# EAGLE board Noduino-Open-Onoff-V1.0-Produce (EAGLE 6.6.0), part 1 of 2
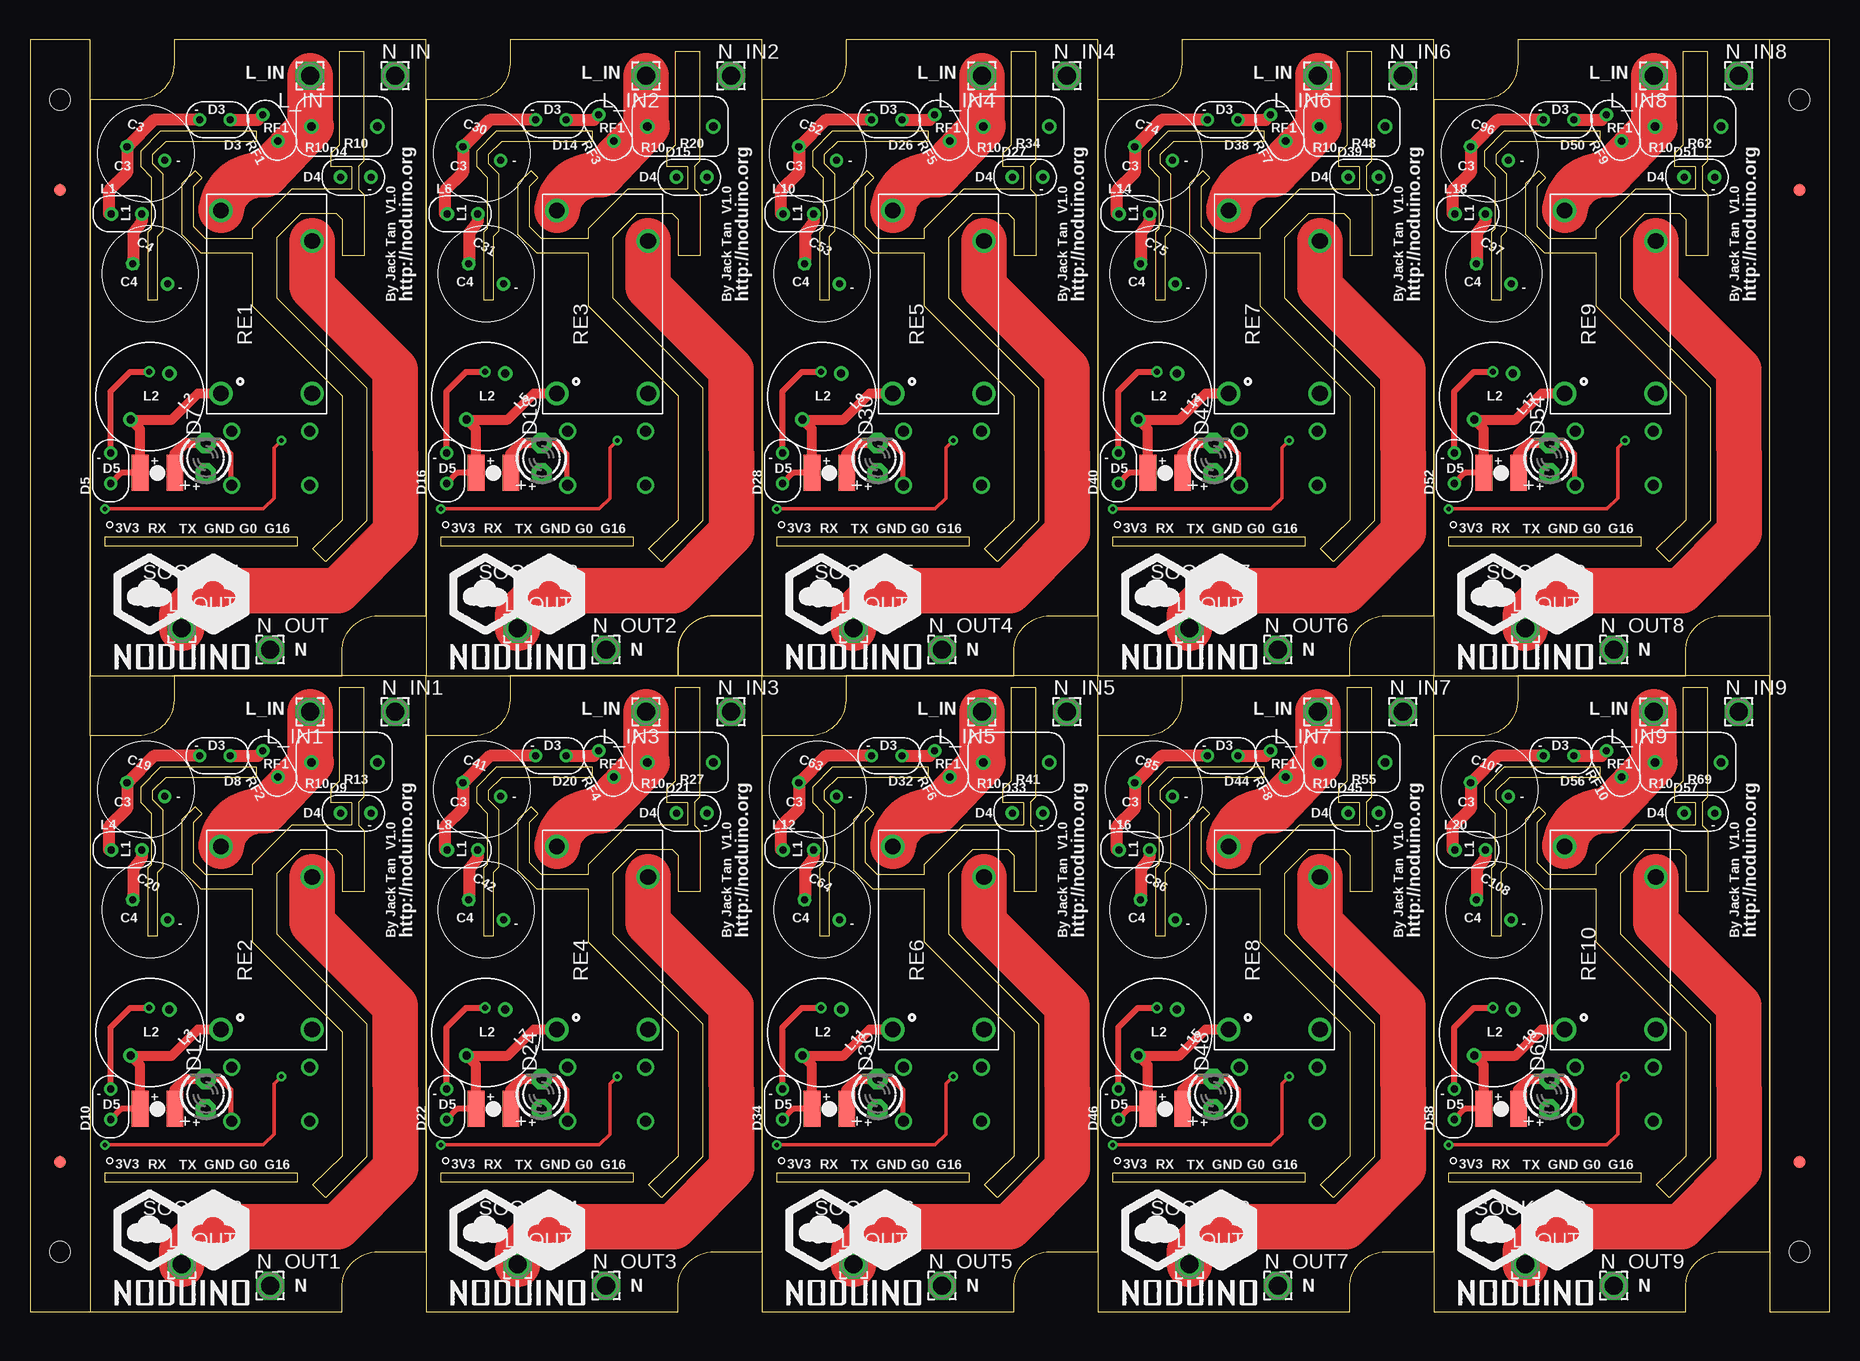
[diagram p0: board, top side]
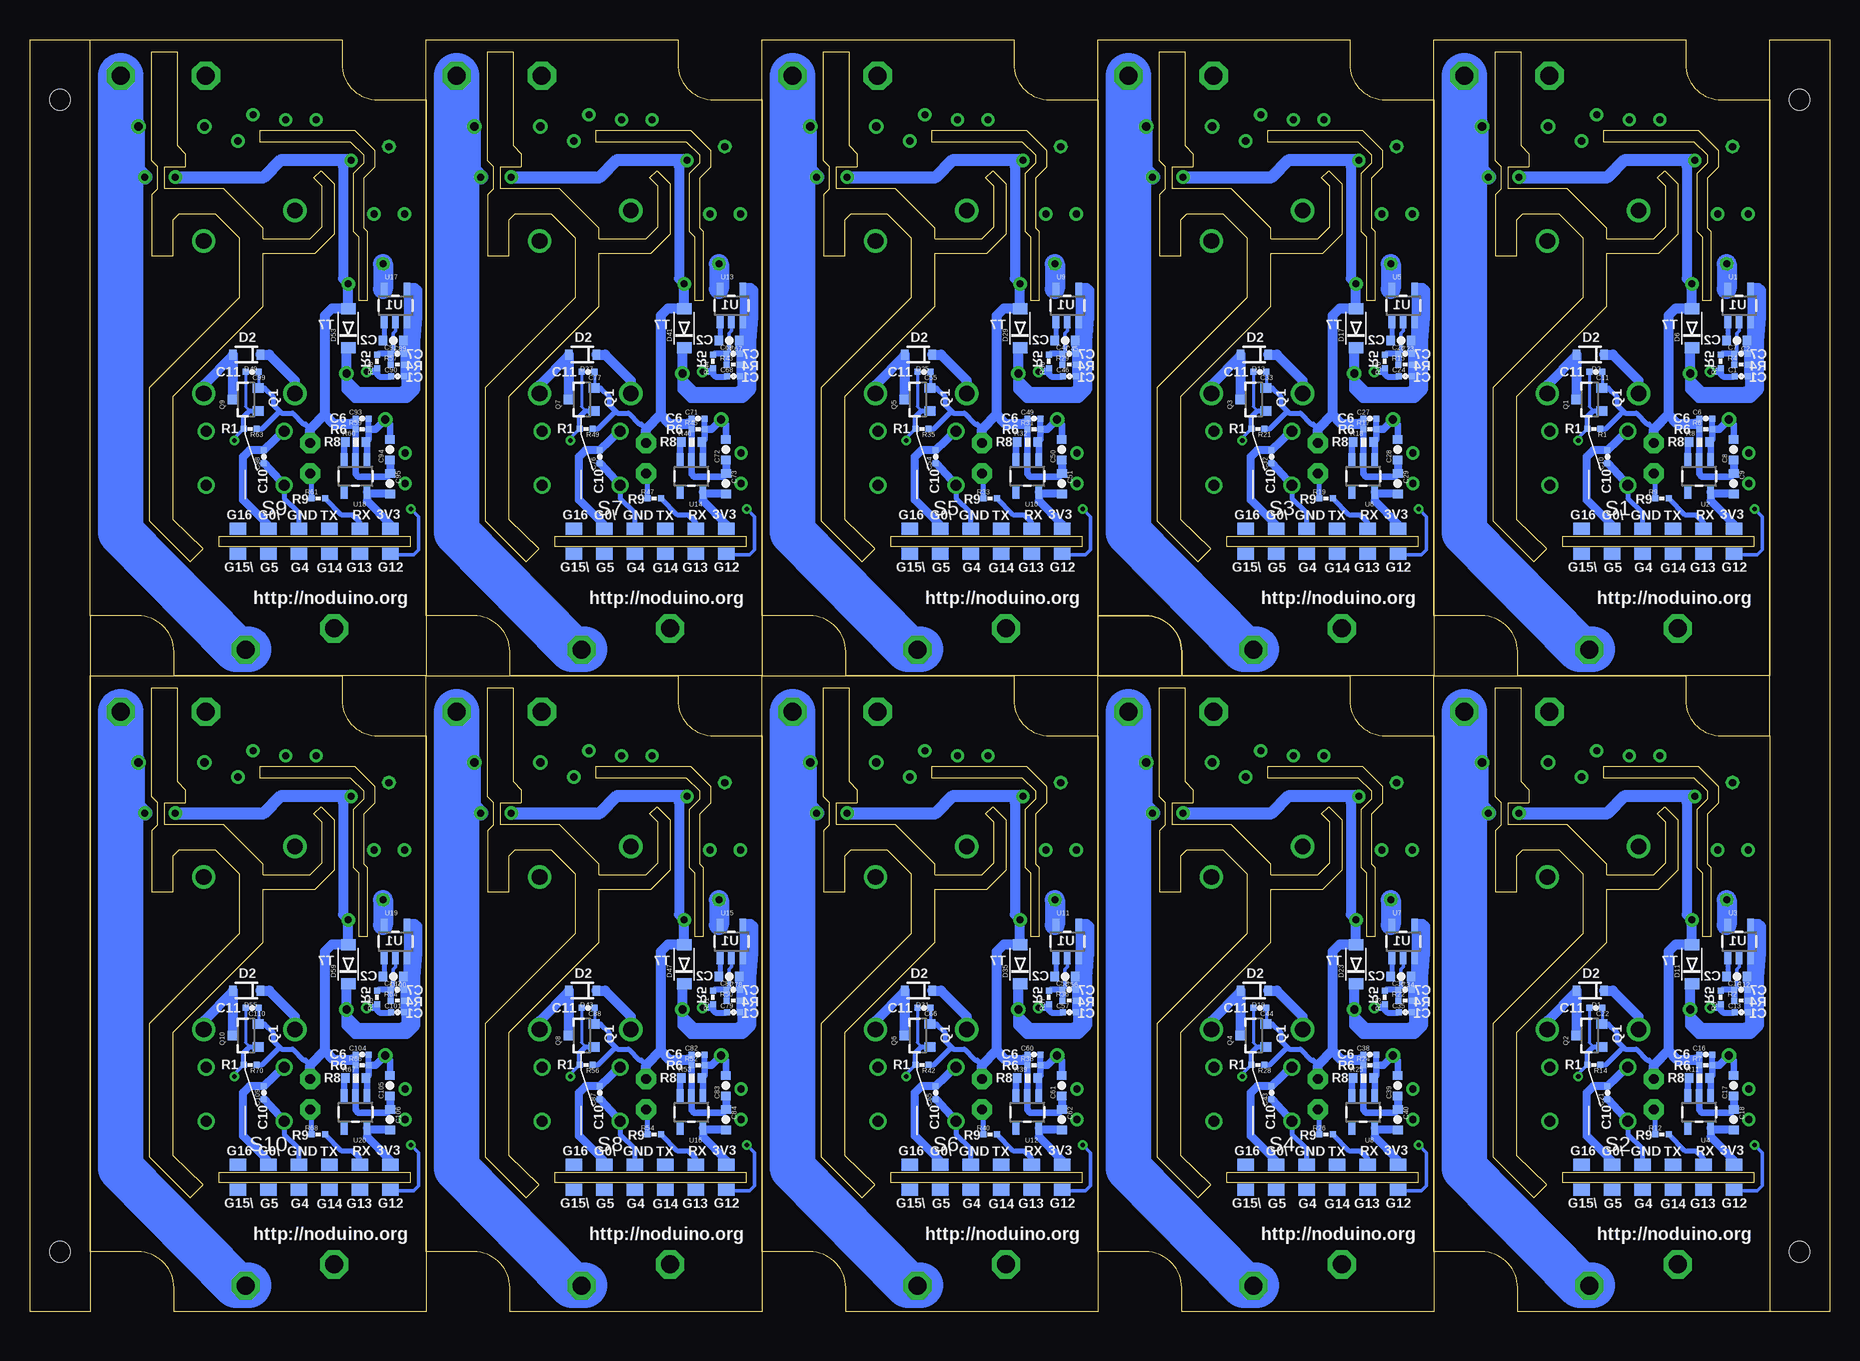
[diagram p1: board, bottom side, seen from below]

Size 150 x 106 mm. Coordinates in mm from the lower left corner, seen from the top.
Outline: 5,101 5,53
Outline: 5,48 5,0
Outline: 145,58 145,106
Outline: 145,5 145,53
Outline: 145,106 150,106 150,0 145,0 145,58
Outline: 5,0 0,0 0,106 5,106 5,48
Outline: 5,101 9,101 arc90 12,104 12,106 33,106 33,58 29,58 arc90 26,55 26,53 5,53
Outline: 5,101 5,53
Outline: 33,53 33,5 29,5 arc90 26,2 26,0 5,0
Outline: 33,53 12,53 12,51 arc-90 9,48 5,48
Outline: 5,48 5,0
Outline: 33,53 33,101 37,101 arc90 40,104 40,106 61,106 61,58 57,58 arc90 54,55 54,53 33,53
Outline: 61,53 61,5 57,5 arc90 54,2 54,0 33,0 33,48 37,48 arc90 40,51 40,53 61,53
Outline: 61,53 61,101 65,101 arc90 68,104 68,106 89,106 89,58 85,58 arc90 82,55 82,53 61,53
Outline: 89,53 89,5 85,5 arc90 82,2 82,0 61,0 61,48 65,48 arc90 68,51 68,53 89,53
Outline: 89,53 89,101 93,101 arc90 96,104 96,106 117,106 117,58 113,58 arc90 110,55 110,53 89,53
Outline: 117,53 117,5 113,5 arc90 110,2 110,0 89,0 89,48 93,48 arc90 96,51 96,53 117,53
Outline: 145,58 145,106
Outline: 145,106 124,106 124,104 arc-90 121,101 117,101 117,53
Outline: 117,53 138,53 138,55 arc-90 141,58 145,58
Outline: 145,5 145,53
Outline: 145,53 124,53 124,51 arc-90 121,48 117,48 117,0 138,0 138,2 arc-90 141,5 145,5
Copper layers (1*16): Top 0.035mm / dielectric 1.5mm / Bottom 0.035mm
Design rules "default": minimum track width 10mil, minimum drill 24mil, track to track 8mil, track to pad 8mil, pad to pad 8mil, via to via 8mil, smd to smd 8mil, copper to edge 40mil, drill to drill 8mil, minimum pad ring 10mil, minimum via ring 8mil, stop-mask expansion 4mil, vias tented up to drill 0mil, thermal gap 10mil
Holes 1.7 mm at 147.5,101 147.5,5 2.5,5 2.5,101
Milling: 580 lines

## Footprints (pad centres in the part's own frame; a part is rotated, then mirrored left to right if it is on the bottom)
0402-CAP = smd 0.5 x 0.5: 1 -0.55,0; 2 0.55,0
0603-CAP = smd 0.7 x 0.8: 1 -0.85,0; 2 0.85,0
CPOL-RADIOA-3.3UF-400V = drill 0.6 octagon: P$1 -1.675,0 | drill 0.6: P$2 1.675,0
B3528-CAP = smd 1.4 x 3: 1 -1.45,0; 2 1.45,0
SOD-323 = smd 0.63 x 0.83: 1 -1.15,0; 2 1.15,0
2.54-0.5 = drill 0.6: P$1 -1.27,0; P$2 1.27,0
SOD-123 = smd 0.91 x 1.22: A 1.637,0; C -1.637,0
LED3MM = drill 0.813 pad 1.676 octagon: A -1.27,0; K 1.27,0
MARK-1MM = smd 1 x 1: P$1 0,0
INDUCTOR-5-0.5 = drill 0.7: P$1 -2.5,0; P$2 2.5,0
2,15/1,0 = drill 1.5 pad 2.35 octagon: 1 0,0
SOT23-3 = smd 0.8 x 0.9: 1 -0.95,-1; 2 0.95,-1; 3 0,1.1
0402-RES = smd 0.5 x 0.5: 1 -0.55,0; 2 0.55,0
0603-RES = smd 0.7 x 0.8: 1 -0.85,0; 2 0.85,0
07D471K = drill 0.7: P$1 -2.75,0; P$2 2.75,0
HKE-HRS3FN = drill 1.3: 1 0,7.6; 2 0,0; 3 12.7,0; 4 15.24,7.6
SWITCH-TS-037 = drill 0.9: P$1 -3.25,2.25; P$2 3.25,2.25; P$3 -3.25,-2.25; P$4 3.25,-2.25
MOD-PLUG-SOCKET-V2.0 = smd 1.4 x 1 bottom: 1 14.2,-1.04; 2 11.66,-1.04; 3 9.12,-1.04; 4 6.58,-1.04; 5 4.04,-1.04; 6 1.5,-1.06; 7 1.5,1.04; 8 4.04,1.04; 9 6.58,1.04; 10 9.12,1.04; 11 11.66,1.04; 12 14.2,1.04
SOT23-5 = smd 0.55 x 1.2: 1 -0.95,-1.3; 2 0,-1.3; 3 0.95,-1.3; 4 0.95,1.3; 5 -0.95,1.3

## Placement (x,y rotation side)
C1  220nF  [0402-CAP]  7.35,77.96 0 bottom
C2  2.2uF  [0603-CAP]  7.73,80.93 180 bottom
C3  400V/3.3uF  [CPOL-RADIOA-3.3UF-400V]  9.66,96.53 340 top
C4  400V/3.3uF  [CPOL-RADIOA-3.3UF-400V]  10.02,86.5 330 top
C5  100uF/6.3V  [B3528-CAP]  10.63,69.91 180 top
C6  1uF  [0402-CAP]  10.31,74.43 0 bottom
C7  470pF  [0402-CAP]  7.37,79.83 0 bottom
C8  4.7uF  [0603-CAP]  7.99,71.85 90 bottom
C9  4.7uF  [0603-CAP]  7.98,69.01 270 bottom
C10  100nF  [0402-CAP]  18.51,71.26 90 bottom
C11  100nF  [0402-CAP]  19.48,78.32 180 bottom
C12  2.2uF  [0603-CAP]  7.73,27.93 180 bottom
C13  220nF  [0402-CAP]  7.35,24.96 0 bottom
C14  470pF  [0402-CAP]  7.37,26.83 0 bottom
C15  100uF/6.3V  [B3528-CAP]  10.63,16.91 180 top
C16  1uF  [0402-CAP]  10.31,21.43 0 bottom
C17  4.7uF  [0603-CAP]  7.99,18.85 90 bottom
C18  4.7uF  [0603-CAP]  7.98,16.01 270 bottom
C19  400V/3.3uF  [CPOL-RADIOA-3.3UF-400V]  9.66,43.53 340 top
C20  400V/3.3uF  [CPOL-RADIOA-3.3UF-400V]  10.02,33.5 330 top
C21  100nF  [0402-CAP]  18.51,18.26 90 bottom
C22  100nF  [0402-CAP]  19.48,25.32 180 bottom
C23  2.2uF  [0603-CAP]  35.73,80.93 180 bottom
C24  220nF  [0402-CAP]  35.35,77.96 0 bottom
C25  470pF  [0402-CAP]  35.37,79.83 0 bottom
C26  100uF/6.3V  [B3528-CAP]  38.63,69.91 180 top
C27  1uF  [0402-CAP]  38.31,74.43 0 bottom
C28  4.7uF  [0603-CAP]  35.99,71.85 90 bottom
C29  4.7uF  [0603-CAP]  35.98,69.01 270 bottom
C30  400V/3.3uF  [CPOL-RADIOA-3.3UF-400V]  37.66,96.53 340 top
C31  400V/3.3uF  [CPOL-RADIOA-3.3UF-400V]  38.02,86.5 330 top
C32  100nF  [0402-CAP]  46.51,71.26 90 bottom
C33  100nF  [0402-CAP]  47.48,78.32 180 bottom
C34  2.2uF  [0603-CAP]  35.73,27.93 180 bottom
C35  220nF  [0402-CAP]  35.35,24.96 0 bottom
C36  470pF  [0402-CAP]  35.37,26.83 0 bottom
C37  100uF/6.3V  [B3528-CAP]  38.63,16.91 180 top
C38  1uF  [0402-CAP]  38.31,21.43 0 bottom
C39  4.7uF  [0603-CAP]  35.99,18.85 90 bottom
C40  4.7uF  [0603-CAP]  35.98,16.01 270 bottom
C41  400V/3.3uF  [CPOL-RADIOA-3.3UF-400V]  37.66,43.53 340 top
C42  400V/3.3uF  [CPOL-RADIOA-3.3UF-400V]  38.02,33.5 330 top
C43  100nF  [0402-CAP]  46.51,18.26 90 bottom
C44  100nF  [0402-CAP]  47.48,25.32 180 bottom
C45  2.2uF  [0603-CAP]  63.73,80.93 180 bottom
C46  220nF  [0402-CAP]  63.35,77.96 0 bottom
C47  470pF  [0402-CAP]  63.37,79.83 0 bottom
C48  100uF/6.3V  [B3528-CAP]  66.63,69.91 180 top
C49  1uF  [0402-CAP]  66.31,74.43 0 bottom
C50  4.7uF  [0603-CAP]  63.99,71.85 90 bottom
C51  4.7uF  [0603-CAP]  63.98,69.01 270 bottom
C52  400V/3.3uF  [CPOL-RADIOA-3.3UF-400V]  65.66,96.53 340 top
C53  400V/3.3uF  [CPOL-RADIOA-3.3UF-400V]  66.02,86.5 330 top
C54  100nF  [0402-CAP]  74.51,71.26 90 bottom
C55  100nF  [0402-CAP]  75.48,78.32 180 bottom
C56  2.2uF  [0603-CAP]  63.73,27.93 180 bottom
C57  220nF  [0402-CAP]  63.35,24.96 0 bottom
C58  470pF  [0402-CAP]  63.37,26.83 0 bottom
C59  100uF/6.3V  [B3528-CAP]  66.63,16.91 180 top
C60  1uF  [0402-CAP]  66.31,21.43 0 bottom
C61  4.7uF  [0603-CAP]  63.99,18.85 90 bottom
C62  4.7uF  [0603-CAP]  63.98,16.01 270 bottom
C63  400V/3.3uF  [CPOL-RADIOA-3.3UF-400V]  65.66,43.53 340 top
C64  400V/3.3uF  [CPOL-RADIOA-3.3UF-400V]  66.02,33.5 330 top
C65  100nF  [0402-CAP]  74.51,18.26 90 bottom
C66  100nF  [0402-CAP]  75.48,25.32 180 bottom
C67  2.2uF  [0603-CAP]  91.73,80.93 180 bottom
C68  220nF  [0402-CAP]  91.35,77.96 0 bottom
C69  470pF  [0402-CAP]  91.37,79.83 0 bottom
C70  100uF/6.3V  [B3528-CAP]  94.63,69.91 180 top
C71  1uF  [0402-CAP]  94.31,74.43 0 bottom
C72  4.7uF  [0603-CAP]  91.99,71.85 90 bottom
C73  4.7uF  [0603-CAP]  91.98,69.01 270 bottom
C74  400V/3.3uF  [CPOL-RADIOA-3.3UF-400V]  93.66,96.53 340 top
C75  400V/3.3uF  [CPOL-RADIOA-3.3UF-400V]  94.02,86.5 330 top
C76  100nF  [0402-CAP]  102.51,71.26 90 bottom
C77  100nF  [0402-CAP]  103.48,78.32 180 bottom
C78  2.2uF  [0603-CAP]  91.73,27.93 180 bottom
C79  220nF  [0402-CAP]  91.35,24.96 0 bottom
C80  470pF  [0402-CAP]  91.37,26.83 0 bottom
C81  100uF/6.3V  [B3528-CAP]  94.63,16.91 180 top
C82  1uF  [0402-CAP]  94.31,21.43 0 bottom
C83  4.7uF  [0603-CAP]  91.99,18.85 90 bottom
C84  4.7uF  [0603-CAP]  91.98,16.01 270 bottom
C85  400V/3.3uF  [CPOL-RADIOA-3.3UF-400V]  93.66,43.53 340 top
C86  400V/3.3uF  [CPOL-RADIOA-3.3UF-400V]  94.02,33.5 330 top
C87  100nF  [0402-CAP]  102.51,18.26 90 bottom
C88  100nF  [0402-CAP]  103.48,25.32 180 bottom
C89  2.2uF  [0603-CAP]  119.73,80.93 180 bottom
C90  220nF  [0402-CAP]  119.35,77.96 0 bottom
C91  470pF  [0402-CAP]  119.37,79.83 0 bottom
C92  100uF/6.3V  [B3528-CAP]  122.63,69.91 180 top
C93  1uF  [0402-CAP]  122.31,74.43 0 bottom
C94  4.7uF  [0603-CAP]  119.99,71.85 90 bottom
C95  4.7uF  [0603-CAP]  119.98,69.01 270 bottom
C96  400V/3.3uF  [CPOL-RADIOA-3.3UF-400V]  121.66,96.53 340 top
C97  400V/3.3uF  [CPOL-RADIOA-3.3UF-400V]  122.02,86.5 330 top
C98  100nF  [0402-CAP]  130.51,71.26 90 bottom
C99  100nF  [0402-CAP]  131.48,78.32 180 bottom
C100  2.2uF  [0603-CAP]  119.73,27.93 180 bottom
C101  220nF  [0402-CAP]  119.35,24.96 0 bottom
C102  470pF  [0402-CAP]  119.37,26.83 0 bottom
C103  100uF/6.3V  [B3528-CAP]  122.63,16.91 180 top
C104  1uF  [0402-CAP]  122.31,21.43 0 bottom
C105  4.7uF  [0603-CAP]  119.99,18.85 90 bottom
C106  4.7uF  [0603-CAP]  119.98,16.01 270 bottom
C107  400V/3.3uF  [CPOL-RADIOA-3.3UF-400V]  121.66,43.53 340 top
C108  400V/3.3uF  [CPOL-RADIOA-3.3UF-400V]  122.02,33.5 330 top
C109  100nF  [0402-CAP]  130.51,18.26 90 bottom
C110  100nF  [0402-CAP]  131.48,25.32 180 bottom
D1  1N4007  [SOD-323]  19.94,26.77 180 bottom
D2  1N4007  [SOD-323]  19.94,79.77 180 bottom
D3  1N4007  [2.54-0.5]  15.41,99.33 180 top
D4  1N4007  [2.54-0.5]  27.16,94.56 0 top
D5  1N4007  [2.54-0.5]  6.72,70.29 90 top
D6  T7  [SOD-123]  11.47,81.96 90 bottom
D7  RED  [LED3MM]  14.64,71.13 90 top
D8  1N4007  [2.54-0.5]  15.41,46.33 180 top
D9  1N4007  [2.54-0.5]  27.16,41.56 0 top
D10  1N4007  [2.54-0.5]  6.72,17.29 90 top
D11  T7  [SOD-123]  11.47,28.96 90 bottom
D12  RED  [LED3MM]  14.64,18.13 90 top
D13  1N4007  [SOD-323]  47.94,79.77 180 bottom
D14  1N4007  [2.54-0.5]  43.41,99.33 180 top
D15  1N4007  [2.54-0.5]  55.16,94.56 0 top
D16  1N4007  [2.54-0.5]  34.72,70.29 90 top
D17  T7  [SOD-123]  39.47,81.96 90 bottom
D18  RED  [LED3MM]  42.64,71.13 90 top
D19  1N4007  [SOD-323]  47.94,26.77 180 bottom
D20  1N4007  [2.54-0.5]  43.41,46.33 180 top
D21  1N4007  [2.54-0.5]  55.16,41.56 0 top
D22  1N4007  [2.54-0.5]  34.72,17.29 90 top
D23  T7  [SOD-123]  39.47,28.96 90 bottom
D24  RED  [LED3MM]  42.64,18.13 90 top
D25  1N4007  [SOD-323]  75.94,79.77 180 bottom
D26  1N4007  [2.54-0.5]  71.41,99.33 180 top
D27  1N4007  [2.54-0.5]  83.16,94.56 0 top
D28  1N4007  [2.54-0.5]  62.72,70.29 90 top
D29  T7  [SOD-123]  67.47,81.96 90 bottom
D30  RED  [LED3MM]  70.64,71.13 90 top
D31  1N4007  [SOD-323]  75.94,26.77 180 bottom
D32  1N4007  [2.54-0.5]  71.41,46.33 180 top
D33  1N4007  [2.54-0.5]  83.16,41.56 0 top
D34  1N4007  [2.54-0.5]  62.72,17.29 90 top
D35  T7  [SOD-123]  67.47,28.96 90 bottom
D36  RED  [LED3MM]  70.64,18.13 90 top
D37  1N4007  [SOD-323]  103.94,79.77 180 bottom
D38  1N4007  [2.54-0.5]  99.41,99.33 180 top
D39  1N4007  [2.54-0.5]  111.16,94.56 0 top
D40  1N4007  [2.54-0.5]  90.72,70.29 90 top
D41  T7  [SOD-123]  95.47,81.96 90 bottom
D42  RED  [LED3MM]  98.64,71.13 90 top
D43  1N4007  [SOD-323]  103.94,26.77 180 bottom
D44  1N4007  [2.54-0.5]  99.41,46.33 180 top
D45  1N4007  [2.54-0.5]  111.16,41.56 0 top
D46  1N4007  [2.54-0.5]  90.72,17.29 90 top
D47  T7  [SOD-123]  95.47,28.96 90 bottom
D48  RED  [LED3MM]  98.64,18.13 90 top
D49  1N4007  [SOD-323]  131.94,79.77 180 bottom
D50  1N4007  [2.54-0.5]  127.41,99.33 180 top
D51  1N4007  [2.54-0.5]  139.16,94.56 0 top
D52  1N4007  [2.54-0.5]  118.72,70.29 90 top
D53  T7  [SOD-123]  123.47,81.96 90 bottom
D54  RED  [LED3MM]  126.64,71.13 90 top
D55  1N4007  [SOD-323]  131.94,26.77 180 bottom
D56  1N4007  [2.54-0.5]  127.41,46.33 180 top
D57  1N4007  [2.54-0.5]  139.16,41.56 0 top
D58  1N4007  [2.54-0.5]  118.72,17.29 90 top
D59  T7  [SOD-123]  123.47,28.96 90 bottom
D60  RED  [LED3MM]  126.64,18.13 90 top
E$1  [MARK-1MM]  2.5,12.5 180 top
E$2  [MARK-1MM]  2.5,93.5 180 top
E$3  [MARK-1MM]  147.5,93.5 0 top
E$4  [MARK-1MM]  147.5,12.5 0 top
L1  1mH  [2.54-0.5]  8.05,91.48 0 top
L2  1mH  [INDUCTOR-5-0.5]  10,76.27 230 top
L3  1mH  [INDUCTOR-5-0.5]  10,23.27 230 top
L4  1mH  [2.54-0.5]  8.05,38.48 0 top
L5  1mH  [INDUCTOR-5-0.5]  38,76.27 230 top
L6  1mH  [2.54-0.5]  36.05,91.48 0 top
L7  1mH  [INDUCTOR-5-0.5]  38,23.27 230 top
L8  1mH  [2.54-0.5]  36.05,38.48 0 top
L9  1mH  [INDUCTOR-5-0.5]  66,76.27 230 top
L10  1mH  [2.54-0.5]  64.05,91.48 0 top
L11  1mH  [INDUCTOR-5-0.5]  66,23.27 230 top
L12  1mH  [2.54-0.5]  64.05,38.48 0 top
L13  1mH  [INDUCTOR-5-0.5]  94,76.27 230 top
L14  1mH  [2.54-0.5]  92.05,91.48 0 top
L15  1mH  [INDUCTOR-5-0.5]  94,23.27 230 top
L16  1mH  [2.54-0.5]  92.05,38.48 0 top
L17  1mH  [INDUCTOR-5-0.5]  122,76.27 230 top
L18  1mH  [2.54-0.5]  120.05,91.48 0 top
L19  1mH  [INDUCTOR-5-0.5]  122,23.27 230 top
L20  1mH  [2.54-0.5]  120.05,38.48 0 top
L_IN  [2,15/1,0]  23.34,103.01 180 top
L_IN1  [2,15/1,0]  23.34,50.01 180 top
L_IN2  [2,15/1,0]  51.34,103.01 180 top
L_IN3  [2,15/1,0]  51.34,50.01 180 top
L_IN4  [2,15/1,0]  79.34,103.01 180 top
L_IN5  [2,15/1,0]  79.34,50.01 180 top
L_IN6  [2,15/1,0]  107.34,103.01 180 top
L_IN7  [2,15/1,0]  107.34,50.01 180 top
L_IN8  [2,15/1,0]  135.34,103.01 180 top
L_IN9  [2,15/1,0]  135.34,50.01 180 top
L_OUT  [2,15/1,0]  12.66,56.94 0 top
L_OUT1  [2,15/1,0]  12.66,3.94 0 top
L_OUT2  [2,15/1,0]  40.66,56.94 0 top
L_OUT3  [2,15/1,0]  40.66,3.94 0 top
L_OUT4  [2,15/1,0]  68.66,56.94 0 top
L_OUT5  [2,15/1,0]  68.66,3.94 0 top
L_OUT6  [2,15/1,0]  96.66,56.94 0 top
L_OUT7  [2,15/1,0]  96.66,3.94 0 top
L_OUT8  [2,15/1,0]  124.66,56.94 0 top
L_OUT9  [2,15/1,0]  124.66,3.94 0 top
N_IN  [2,15/1,0]  30.43,103.01 0 top
N_IN1  [2,15/1,0]  30.43,50.01 0 top
N_IN2  [2,15/1,0]  58.43,103.01 0 top
N_IN3  [2,15/1,0]  58.43,50.01 0 top
N_IN4  [2,15/1,0]  86.43,103.01 0 top
N_IN5  [2,15/1,0]  86.43,50.01 0 top
N_IN6  [2,15/1,0]  114.43,103.01 0 top
N_IN7  [2,15/1,0]  114.43,50.01 0 top
N_IN8  [2,15/1,0]  142.43,103.01 0 top
N_IN9  [2,15/1,0]  142.43,50.01 0 top
N_OUT  [2,15/1,0]  20.01,55.18 0 top
N_OUT1  [2,15/1,0]  20.01,2.18 0 top
N_OUT2  [2,15/1,0]  48.01,55.18 0 top
N_OUT3  [2,15/1,0]  48.01,2.18 0 top
N_OUT4  [2,15/1,0]  76.01,55.18 0 top
N_OUT5  [2,15/1,0]  76.01,2.18 0 top
N_OUT6  [2,15/1,0]  104.01,55.18 0 top
N_OUT7  [2,15/1,0]  104.01,2.18 0 top
N_OUT8  [2,15/1,0]  132.01,55.18 0 top
N_OUT9  [2,15/1,0]  132.01,2.18 0 top
Q1  SI2302  [SOT23-3]  19.97,76.03 90 bottom
Q2  SI2302  [SOT23-3]  19.97,23.03 90 bottom
Q3  SI2302  [SOT23-3]  47.97,76.03 90 bottom
Q4  SI2302  [SOT23-3]  47.97,23.03 90 bottom
Q5  SI2302  [SOT23-3]  75.97,76.03 90 bottom
Q6  SI2302  [SOT23-3]  75.97,23.03 90 bottom
Q7  SI2302  [SOT23-3]  103.97,76.03 90 bottom
Q8  SI2302  [SOT23-3]  103.97,23.03 90 bottom
Q9  SI2302  [SOT23-3]  131.97,76.03 90 bottom
Q10  SI2302  [SOT23-3]  131.97,23.03 90 bottom
R1  1K  [0402-RES]  19.64,73.58 180 bottom
R2  4.99K  [0402-RES]  7.37,25.93 0 bottom
R3  4.99K  [0402-RES]  9.08,26.2 90 bottom
R4  4.99K  [0402-RES]  7.37,78.93 0 bottom
R5  4.99K  [0402-RES]  9.08,79.2 90 bottom
R6  680R  [0402-RES]  10.31,73.55 0 bottom
R7  680R  [0402-RES]  10.31,20.55 0 bottom
R8  10K  [0603-RES]  10.85,72.47 0 bottom
R9  1K  [0402-RES]  13.96,67.79 0 bottom
R10  07D471K  [07D471K]  26.19,98.78 180 top
R11  10K  [0603-RES]  10.85,19.47 0 bottom
R12  1K  [0402-RES]  13.96,14.79 0 bottom
R13  07D471K  [07D471K]  26.19,45.78 180 top
R14  1K  [0402-RES]  19.64,20.58 180 bottom
R15  4.99K  [0402-RES]  35.37,78.93 0 bottom
R16  4.99K  [0402-RES]  37.08,79.2 90 bottom
R17  680R  [0402-RES]  38.31,73.55 0 bottom
R18  10K  [0603-RES]  38.85,72.47 0 bottom
R19  1K  [0402-RES]  41.96,67.79 0 bottom
R20  07D471K  [07D471K]  54.19,98.78 180 top
R21  1K  [0402-RES]  47.64,73.58 180 bottom
R22  4.99K  [0402-RES]  35.37,25.93 0 bottom
R23  4.99K  [0402-RES]  37.08,26.2 90 bottom
R24  680R  [0402-RES]  38.31,20.55 0 bottom
R25  10K  [0603-RES]  38.85,19.47 0 bottom
R26  1K  [0402-RES]  41.96,14.79 0 bottom
R27  07D471K  [07D471K]  54.19,45.78 180 top
R28  1K  [0402-RES]  47.64,20.58 180 bottom
R29  4.99K  [0402-RES]  63.37,78.93 0 bottom
R30  4.99K  [0402-RES]  65.08,79.2 90 bottom
R31  680R  [0402-RES]  66.31,73.55 0 bottom
R32  10K  [0603-RES]  66.85,72.47 0 bottom
R33  1K  [0402-RES]  69.96,67.79 0 bottom
R34  07D471K  [07D471K]  82.19,98.78 180 top
R35  1K  [0402-RES]  75.64,73.58 180 bottom
R36  4.99K  [0402-RES]  63.37,25.93 0 bottom
R37  4.99K  [0402-RES]  65.08,26.2 90 bottom
R38  680R  [0402-RES]  66.31,20.55 0 bottom
R39  10K  [0603-RES]  66.85,19.47 0 bottom
R40  1K  [0402-RES]  69.96,14.79 0 bottom
R41  07D471K  [07D471K]  82.19,45.78 180 top
R42  1K  [0402-RES]  75.64,20.58 180 bottom
R43  4.99K  [0402-RES]  91.37,78.93 0 bottom
R44  4.99K  [0402-RES]  93.08,79.2 90 bottom
R45  680R  [0402-RES]  94.31,73.55 0 bottom
R46  10K  [0603-RES]  94.85,72.47 0 bottom
R47  1K  [0402-RES]  97.96,67.79 0 bottom
R48  07D471K  [07D471K]  110.19,98.78 180 top
R49  1K  [0402-RES]  103.64,73.58 180 bottom
R50  4.99K  [0402-RES]  91.37,25.93 0 bottom
R51  4.99K  [0402-RES]  93.08,26.2 90 bottom
R52  680R  [0402-RES]  94.31,20.55 0 bottom
R53  10K  [0603-RES]  94.85,19.47 0 bottom
R54  1K  [0402-RES]  97.96,14.79 0 bottom
R55  07D471K  [07D471K]  110.19,45.78 180 top
R56  1K  [0402-RES]  103.64,20.58 180 bottom
R57  4.99K  [0402-RES]  119.37,78.93 0 bottom
R58  4.99K  [0402-RES]  121.08,79.2 90 bottom
R59  680R  [0402-RES]  122.31,73.55 0 bottom
R60  10K  [0603-RES]  122.85,72.47 0 bottom
R61  1K  [0402-RES]  125.96,67.79 0 bottom
R62  07D471K  [07D471K]  138.19,98.78 180 top
R63  1K  [0402-RES]  131.64,73.58 180 bottom
R64  4.99K  [0402-RES]  119.37,25.93 0 bottom
R65  4.99K  [0402-RES]  121.08,26.2 90 bottom
R66  680R  [0402-RES]  122.31,20.55 0 bottom
R67  10K  [0603-RES]  122.85,19.47 0 bottom
R68  1K  [0402-RES]  125.96,14.79 0 bottom
R69  07D471K  [07D471K]  138.19,45.78 180 top
R70  1K  [0402-RES]  131.64,20.58 180 bottom
RE1  HRS3FNH  [HKE-HRS3FN]  23.52,76.54 90 top
RE2  HRS3FNH  [HKE-HRS3FN]  23.52,23.54 90 top
RE3  HRS3FNH  [HKE-HRS3FN]  51.52,76.54 90 top
RE4  HRS3FNH  [HKE-HRS3FN]  51.52,23.54 90 top
RE5  HRS3FNH  [HKE-HRS3FN]  79.52,76.54 90 top
RE6  HRS3FNH  [HKE-HRS3FN]  79.52,23.54 90 top
RE7  HRS3FNH  [HKE-HRS3FN]  107.52,76.54 90 top
RE8  HRS3FNH  [HKE-HRS3FN]  107.52,23.54 90 top
RE9  HRS3FNH  [HKE-HRS3FN]  135.52,76.54 90 top
RE10  HRS3FNH  [HKE-HRS3FN]  135.52,23.54 90 top
RF1  10R  [2.54-0.5]  20.04,98.66 120 top
RF2  10R  [2.54-0.5]  20.04,45.66 120 top
RF3  10R  [2.54-0.5]  48.04,98.66 120 top
RF4  10R  [2.54-0.5]  48.04,45.66 120 top
RF5  10R  [2.54-0.5]  76.04,98.66 120 top
RF6  10R  [2.54-0.5]  76.04,45.66 120 top
RF7  10R  [2.54-0.5]  104.04,98.66 120 top
RF8  10R  [2.54-0.5]  104.04,45.66 120 top
RF9  10R  [2.54-0.5]  132.04,98.66 120 top
RF10  10R  [2.54-0.5]  132.04,45.66 120 top
S1  [SWITCH-TS-037]  20.05,71.13 180 bottom
S2  [SWITCH-TS-037]  20.05,18.13 180 bottom
S3  [SWITCH-TS-037]  48.05,71.13 180 bottom
S4  [SWITCH-TS-037]  48.05,18.13 180 bottom
S5  [SWITCH-TS-037]  76.05,71.13 180 bottom
S6  [SWITCH-TS-037]  76.05,18.13 180 bottom
S7  [SWITCH-TS-037]  104.05,71.13 180 bottom
S8  [SWITCH-TS-037]  104.05,18.13 180 bottom
S9  [SWITCH-TS-037]  132.05,71.13 180 bottom
S10  [SWITCH-TS-037]  132.05,18.13 180 bottom
SOCKET1  MOD-SOCKET-V2.0  [MOD-PLUG-SOCKET-V2.0]  22.16,64.2 180 top
SOCKET2  MOD-SOCKET-V2.0  [MOD-PLUG-SOCKET-V2.0]  22.16,11.2 180 top
SOCKET3  MOD-SOCKET-V2.0  [MOD-PLUG-SOCKET-V2.0]  50.16,64.2 180 top
SOCKET4  MOD-SOCKET-V2.0  [MOD-PLUG-SOCKET-V2.0]  50.16,11.2 180 top
SOCKET5  MOD-SOCKET-V2.0  [MOD-PLUG-SOCKET-V2.0]  78.16,64.2 180 top
SOCKET6  MOD-SOCKET-V2.0  [MOD-PLUG-SOCKET-V2.0]  78.16,11.2 180 top
SOCKET7  MOD-SOCKET-V2.0  [MOD-PLUG-SOCKET-V2.0]  106.16,64.2 180 top
SOCKET8  MOD-SOCKET-V2.0  [MOD-PLUG-SOCKET-V2.0]  106.16,11.2 180 top
SOCKET9  MOD-SOCKET-V2.0  [MOD-PLUG-SOCKET-V2.0]  134.16,64.2 180 top
SOCKET10  MOD-SOCKET-V2.0  [MOD-PLUG-SOCKET-V2.0]  134.16,11.2 180 top
U1  F7298  [SOT23-5]  7.53,83.85 0 bottom
U2  AP2112  [SOT23-5]  10.86,69.63 180 bottom
U3  F7298  [SOT23-5]  7.53,30.85 0 bottom
U4  AP2112  [SOT23-5]  10.86,16.63 180 bottom
U5  F7298  [SOT23-5]  35.53,83.85 0 bottom
U6  AP2112  [SOT23-5]  38.86,69.63 180 bottom
U7  F7298  [SOT23-5]  35.53,30.85 0 bottom
U8  AP2112  [SOT23-5]  38.86,16.63 180 bottom
U9  F7298  [SOT23-5]  63.53,83.85 0 bottom
U10  AP2112  [SOT23-5]  66.86,69.63 180 bottom
U11  F7298  [SOT23-5]  63.53,30.85 0 bottom
U12  AP2112  [SOT23-5]  66.86,16.63 180 bottom
U13  F7298  [SOT23-5]  91.53,83.85 0 bottom
U14  AP2112  [SOT23-5]  94.86,69.63 180 bottom
U15  F7298  [SOT23-5]  91.53,30.85 0 bottom
U16  AP2112  [SOT23-5]  94.86,16.63 180 bottom
U17  F7298  [SOT23-5]  119.53,83.85 0 bottom
U18  AP2112  [SOT23-5]  122.86,69.63 180 bottom
U19  F7298  [SOT23-5]  119.53,30.85 0 bottom
U20  AP2112  [SOT23-5]  122.86,16.63 180 bottom
U$1  NODUINO-LOGO-ALL  [NODUINO-ALL-1]  6.64,52.89 0 top
U$2  NODUINO-LOGO-ALL  [NODUINO-ALL-1]  6.64,-0.11 0 top
U$3  NODUINO-LOGO-ALL  [NODUINO-ALL-1]  34.64,52.89 0 top
U$4  NODUINO-LOGO-ALL  [NODUINO-ALL-1]  34.64,-0.11 0 top
U$5  NODUINO-LOGO-ALL  [NODUINO-ALL-1]  62.64,52.89 0 top
U$6  NODUINO-LOGO-ALL  [NODUINO-ALL-1]  62.64,-0.11 0 top
U$7  NODUINO-LOGO-ALL  [NODUINO-ALL-1]  90.64,52.89 0 top
U$8  NODUINO-LOGO-ALL  [NODUINO-ALL-1]  90.64,-0.11 0 top
U$9  NODUINO-LOGO-ALL  [NODUINO-ALL-1]  118.64,52.89 0 top
U$10  NODUINO-LOGO-ALL  [NODUINO-ALL-1]  118.64,-0.11 0 top

## Library data of the parts
C1-C110 D1-D6 D8-D11 D13-D17 D19-D23 D25-D29 D31-D35 D37-D41 D43-D47 D49-D53 D55-D59 E$1-E$4 L1-L20 L_IN L_IN1-L_IN9 L_OUT L_OUT1-L_OUT9 N_IN N_IN1-N_IN9 N_OUT N_OUT1-N_OUT9 Q1-Q10 R1-R70 RE1-RE10 RF1-RF10 S1-S10 SOCKET1-SOCKET10 U1-U20 U$1-U$10 = ehl
D7 D12 D18 D24 D30 D36 D42 D48 D54 D60 = adafruit

## Nets
3V1: C18.2 SOCKET2.1 U4.5
3V2: C29.2 SOCKET3.1 U6.5
3V3: C9.2 SOCKET1.1 U2.5
3V4: C40.2 SOCKET4.1 U8.5
3V5: C51.2 SOCKET5.1 U10.5
3V6: C62.2 SOCKET6.1 U12.5
3V7: C73.2 SOCKET7.1 U14.5
3V8: C84.2 SOCKET8.1 U16.5
3V9: C95.2 SOCKET9.1 U18.5
3V10: C106.2 SOCKET10.1 U20.5
5V: C5.2 C6.2 C8.2 D2.1 D5.P$1 L2.P$2 R6.2 R8.2 RE1.1 U2.1
5V1: C15.2 C16.2 C17.2 D1.1 D10.P$1 L3.P$2 R7.2 R11.2 RE2.1 U4.1
5V2: C26.2 C27.2 C28.2 D13.1 D16.P$1 L5.P$2 R17.2 R18.2 RE3.1 U6.1
5V3: C37.2 C38.2 C39.2 D19.1 D22.P$1 L7.P$2 R24.2 R25.2 RE4.1 U8.1
5V4: C48.2 C49.2 C50.2 D25.1 D28.P$1 L9.P$2 R31.2 R32.2 RE5.1 U10.1
5V5: C59.2 C60.2 C61.2 D31.1 D34.P$1 L11.P$2 R38.2 R39.2 RE6.1 U12.1
5V6: C70.2 C71.2 C72.2 D37.1 D40.P$1 L13.P$2 R45.2 R46.2 RE7.1 U14.1
5V7: C81.2 C82.2 C83.2 D43.1 D46.P$1 L15.P$2 R52.2 R53.2 RE8.1 U16.1
5V8: C92.2 C93.2 C94.2 D49.1 D52.P$1 L17.P$2 R59.2 R60.2 RE9.1 U18.1
5V9: C103.2 C104.2 C105.2 D55.1 D58.P$1 L19.P$2 R66.2 R67.2 RE10.1 U20.1
GND: C3.P$2 C4.P$2 C5.1 C6.1 C8.1 C9.1 C10.1 C11.1 D4.P$1 D6.A D7.K Q1.2 R1.1 R6.1 S1.P$1 SOCKET1.4 U2.2
GND1: C15.1 C16.1 C17.1 C18.1 C19.P$2 C20.P$2 C21.1 C22.1 D9.P$1 D11.A D12.K Q2.2 R7.1 R14.1 S2.P$1 SOCKET2.4 U4.2
GND2: C26.1 C27.1 C28.1 C29.1 C30.P$2 C31.P$2 C32.1 C33.1 D15.P$1 D17.A D18.K Q3.2 R17.1 R21.1 S3.P$1 SOCKET3.4 U6.2
GND3: C37.1 C38.1 C39.1 C40.1 C41.P$2 C42.P$2 C43.1 C44.1 D21.P$1 D23.A D24.K Q4.2 R24.1 R28.1 S4.P$1 SOCKET4.4 U8.2
GND4: C48.1 C49.1 C50.1 C51.1 C52.P$2 C53.P$2 C54.1 C55.1 D27.P$1 D29.A D30.K Q5.2 R31.1 R35.1 S5.P$1 SOCKET5.4 U10.2
GND5: C59.1 C60.1 C61.1 C62.1 C63.P$2 C64.P$2 C65.1 C66.1 D33.P$1 D35.A D36.K Q6.2 R38.1 R42.1 S6.P$1 SOCKET6.4 U12.2
GND6: C70.1 C71.1 C72.1 C73.1 C74.P$2 C75.P$2 C76.1 C77.1 D39.P$1 D41.A D42.K Q7.2 R45.1 R49.1 S7.P$1 SOCKET7.4 U14.2
GND7: C81.1 C82.1 C83.1 C84.1 C85.P$2 C86.P$2 C87.1 C88.1 D45.P$1 D47.A D48.K Q8.2 R52.1 R56.1 S8.P$1 SOCKET8.4 U16.2
GND8: C92.1 C93.1 C94.1 C95.1 C96.P$2 C97.P$2 C98.1 C99.1 D51.P$1 D53.A D54.K Q9.2 R59.1 R63.1 S9.P$1 SOCKET9.4 U18.2
GND9: C103.1 C104.1 C105.1 C106.1 C107.P$2 C108.P$2 C109.1 C110.1 D57.P$1 D59.A D60.K Q10.2 R66.1 R70.1 S10.P$1 SOCKET10.4 U20.2
GPIO0: C10.2 S1.P$3 SOCKET1.5
GPIO1: R12.2 SOCKET2.2
GPIO2: C21.2 S2.P$3 SOCKET2.5
GPIO3: R9.2 SOCKET1.2
GPIO4: R19.2 SOCKET3.2
GPIO5: C32.2 S3.P$3 SOCKET3.5
GPIO6: R26.2 SOCKET4.2
GPIO7: C43.2 S4.P$3 SOCKET4.5
GPIO8: R33.2 SOCKET5.2
GPIO9: C54.2 S5.P$3 SOCKET5.5
GPIO10: R40.2 SOCKET6.2
GPIO11: C65.2 S6.P$3 SOCKET6.5
GPIO12: R47.2 SOCKET7.2
GPIO13: C76.2 S7.P$3 SOCKET7.5
GPIO14: R54.2 SOCKET8.2
GPIO15: C87.2 S8.P$3 SOCKET8.5
GPIO16: R61.2 SOCKET9.2
GPIO17: C98.2 S9.P$3 SOCKET9.5
GPIO18: R68.2 SOCKET10.2
GPIO19: C109.2 S10.P$3 SOCKET10.5
L_IN: L_IN.1 R10.P$2 RE1.4 RF1.P$1
L_IN1: L_IN1.1 R13.P$2 RE2.4 RF2.P$1
L_IN2: L_IN2.1 R20.P$2 RE3.4 RF3.P$1
L_IN3: L_IN3.1 R27.P$2 RE4.4 RF4.P$1
L_IN4: L_IN4.1 R34.P$2 RE5.4 RF5.P$1
L_IN5: L_IN5.1 R41.P$2 RE6.4 RF6.P$1
L_IN6: L_IN6.1 R48.P$2 RE7.4 RF7.P$1
L_IN7: L_IN7.1 R55.P$2 RE8.4 RF8.P$1
L_IN8: L_IN8.1 R62.P$2 RE9.4 RF9.P$1
L_IN9: L_IN9.1 R69.P$2 RE10.4 RF10.P$1
L_OUT: L_OUT.1 RE1.3
L_OUT1: L_OUT1.1 RE2.3
L_OUT2: L_OUT2.1 RE3.3
L_OUT3: L_OUT3.1 RE4.3
L_OUT4: L_OUT4.1 RE5.3
L_OUT5: L_OUT5.1 RE6.3
L_OUT6: L_OUT6.1 RE7.3
L_OUT7: L_OUT7.1 RE8.3
L_OUT8: L_OUT8.1 RE9.3
L_OUT9: L_OUT9.1 RE10.3
N: D4.P$2 N_IN.1 N_OUT.1 R10.P$1
N1: D9.P$2 N_IN1.1 N_OUT1.1 R13.P$1
N2: D15.P$2 N_IN2.1 N_OUT2.1 R20.P$1
N3: D21.P$2 N_IN3.1 N_OUT3.1 R27.P$1
N4: D27.P$2 N_IN4.1 N_OUT4.1 R34.P$1
N5: D33.P$2 N_IN5.1 N_OUT5.1 R41.P$1
N6: D39.P$2 N_IN6.1 N_OUT6.1 R48.P$1
N7: D45.P$2 N_IN7.1 N_OUT7.1 R55.P$1
N8: D51.P$2 N_IN8.1 N_OUT8.1 R62.P$1
N9: D57.P$2 N_IN9.1 N_OUT9.1 R69.P$1
N$1: D1.2 Q2.3 RE2.2
N$2: D2.2 Q1.3 RE1.2
N$3: C3.P$1 D3.P$2 L1.P$1
N$4: C19.P$1 D8.P$2 L4.P$1
N$5: C4.P$1 L1.P$2 U1.5
N$6: C1.2 C2.1 C7.2 D6.C L2.P$1 R4.2 U1.3 U1.4
N$7: D3.P$1 RF1.P$2
N$8: C20.P$1 L4.P$2 U3.5
N$9: C12.1 C13.2 C14.2 D11.C L3.P$1 R2.2 U3.3 U3.4
N$10: C2.2 U1.1
N$11: C7.1 R4.1 R5.2 U1.2
N$12: C1.1 D5.P$2 R5.1
N$13: R8.1 U2.3
N$14: D7.A R9.1
N$15: D8.P$1 RF2.P$2
N$16: C12.2 U3.1
N$17: C14.1 R2.1 R3.2 U3.2
N$18: C13.1 D10.P$2 R3.1
N$19: R11.1 U4.3
N$20: D12.A R12.1
N$21: D13.2 Q3.3 RE3.2
N$22: C30.P$1 D14.P$2 L6.P$1
N$23: C31.P$1 L6.P$2 U5.5
N$24: C23.1 C24.2 C25.2 D17.C L5.P$1 R15.2 U5.3 U5.4
N$25: D14.P$1 RF3.P$2
N$26: C23.2 U5.1
N$27: C25.1 R15.1 R16.2 U5.2
N$28: C24.1 D16.P$2 R16.1
N$29: R18.1 U6.3
N$30: D18.A R19.1
N$31: D19.2 Q4.3 RE4.2
N$32: C41.P$1 D20.P$2 L8.P$1
N$33: C42.P$1 L8.P$2 U7.5
N$34: C34.1 C35.2 C36.2 D23.C L7.P$1 R22.2 U7.3 U7.4
N$35: D20.P$1 RF4.P$2
N$36: C34.2 U7.1
N$37: C36.1 R22.1 R23.2 U7.2
N$38: C35.1 D22.P$2 R23.1
N$39: R25.1 U8.3
N$40: D24.A R26.1
N$41: D25.2 Q5.3 RE5.2
N$42: C52.P$1 D26.P$2 L10.P$1
N$43: C53.P$1 L10.P$2 U9.5
N$44: C45.1 C46.2 C47.2 D29.C L9.P$1 R29.2 U9.3 U9.4
N$45: D26.P$1 RF5.P$2
N$46: C45.2 U9.1
N$47: C47.1 R29.1 R30.2 U9.2
N$48: C46.1 D28.P$2 R30.1
N$49: R32.1 U10.3
N$50: D30.A R33.1
N$51: D31.2 Q6.3 RE6.2
N$52: C63.P$1 D32.P$2 L12.P$1
N$53: C64.P$1 L12.P$2 U11.5
N$54: C56.1 C57.2 C58.2 D35.C L11.P$1 R36.2 U11.3 U11.4
N$55: D32.P$1 RF6.P$2
N$56: C56.2 U11.1
N$57: C58.1 R36.1 R37.2 U11.2
N$58: C57.1 D34.P$2 R37.1
N$59: R39.1 U12.3
N$60: D36.A R40.1
N$61: D37.2 Q7.3 RE7.2
N$62: C74.P$1 D38.P$2 L14.P$1
N$63: C75.P$1 L14.P$2 U13.5
N$64: C67.1 C68.2 C69.2 D41.C L13.P$1 R43.2 U13.3 U13.4
N$65: D38.P$1 RF7.P$2
N$66: C67.2 U13.1
N$67: C69.1 R43.1 R44.2 U13.2
N$68: C68.1 D40.P$2 R44.1
N$69: R46.1 U14.3
N$70: D42.A R47.1
N$71: D43.2 Q8.3 RE8.2
N$72: C85.P$1 D44.P$2 L16.P$1
N$73: C86.P$1 L16.P$2 U15.5
N$74: C78.1 C79.2 C80.2 D47.C L15.P$1 R50.2 U15.3 U15.4
N$75: D44.P$1 RF8.P$2
N$76: C78.2 U15.1
N$77: C80.1 R50.1 R51.2 U15.2
N$78: C79.1 D46.P$2 R51.1
N$79: R53.1 U16.3
N$80: D48.A R54.1
N$81: D49.2 Q9.3 RE9.2
N$82: C96.P$1 D50.P$2 L18.P$1
N$83: C97.P$1 L18.P$2 U17.5
N$84: C89.1 C90.2 C91.2 D53.C L17.P$1 R57.2 U17.3 U17.4
N$85: D50.P$1 RF9.P$2
N$86: C89.2 U17.1
N$87: C91.1 R57.1 R58.2 U17.2
N$88: C90.1 D52.P$2 R58.1
N$89: R60.1 U18.3
N$90: D54.A R61.1
N$91: D55.2 Q10.3 RE10.2
N$92: C107.P$1 D56.P$2 L20.P$1
N$93: C108.P$1 L20.P$2 U19.5
N$94: C100.1 C101.2 C102.2 D59.C L19.P$1 R64.2 U19.3 U19.4
N$95: D56.P$1 RF10.P$2
N$96: C100.2 U19.1
N$97: C102.1 R64.1 R65.2 U19.2
N$98: C101.1 D58.P$2 R65.1
N$99: R67.1 U20.3
N$100: D60.A R68.1
RELAY: C11.2 Q1.1 R1.2 SOCKET1.12
RELAY1: C22.2 Q2.1 R14.2 SOCKET2.12
RELAY2: C33.2 Q3.1 R21.2 SOCKET3.12
RELAY3: C44.2 Q4.1 R28.2 SOCKET4.12
RELAY4: C55.2 Q5.1 R35.2 SOCKET5.12
RELAY5: C66.2 Q6.1 R42.2 SOCKET6.12
RELAY6: C77.2 Q7.1 R49.2 SOCKET7.12
RELAY7: C88.2 Q8.1 R56.2 SOCKET8.12
RELAY8: C99.2 Q9.1 R63.2 SOCKET9.12
RELAY9: C110.2 Q10.1 R70.2 SOCKET10.12
TX: SOCKET1.3
TX1: SOCKET2.3
TX2: SOCKET3.3
TX3: SOCKET4.3
TX4: SOCKET5.3
TX5: SOCKET6.3
TX6: SOCKET7.3
TX7: SOCKET8.3
TX8: SOCKET9.3
TX9: SOCKET10.3